# Altium PCB MGMEZZ02.PCBDOC (part 5 of 5)
Units mil, origin at the board's own origin, x right, y up, seen from the top; angles counter-clockwise.
Board outline 5705.83 x 3625.73 mil, 6 copper layers (Top Layer, Internal Plane 1, Mid-Layer 1, Mid-Layer 2, Internal Plane 2, Bottom Layer); 570 components, 354 nets, 2192 pads, 728 vias.
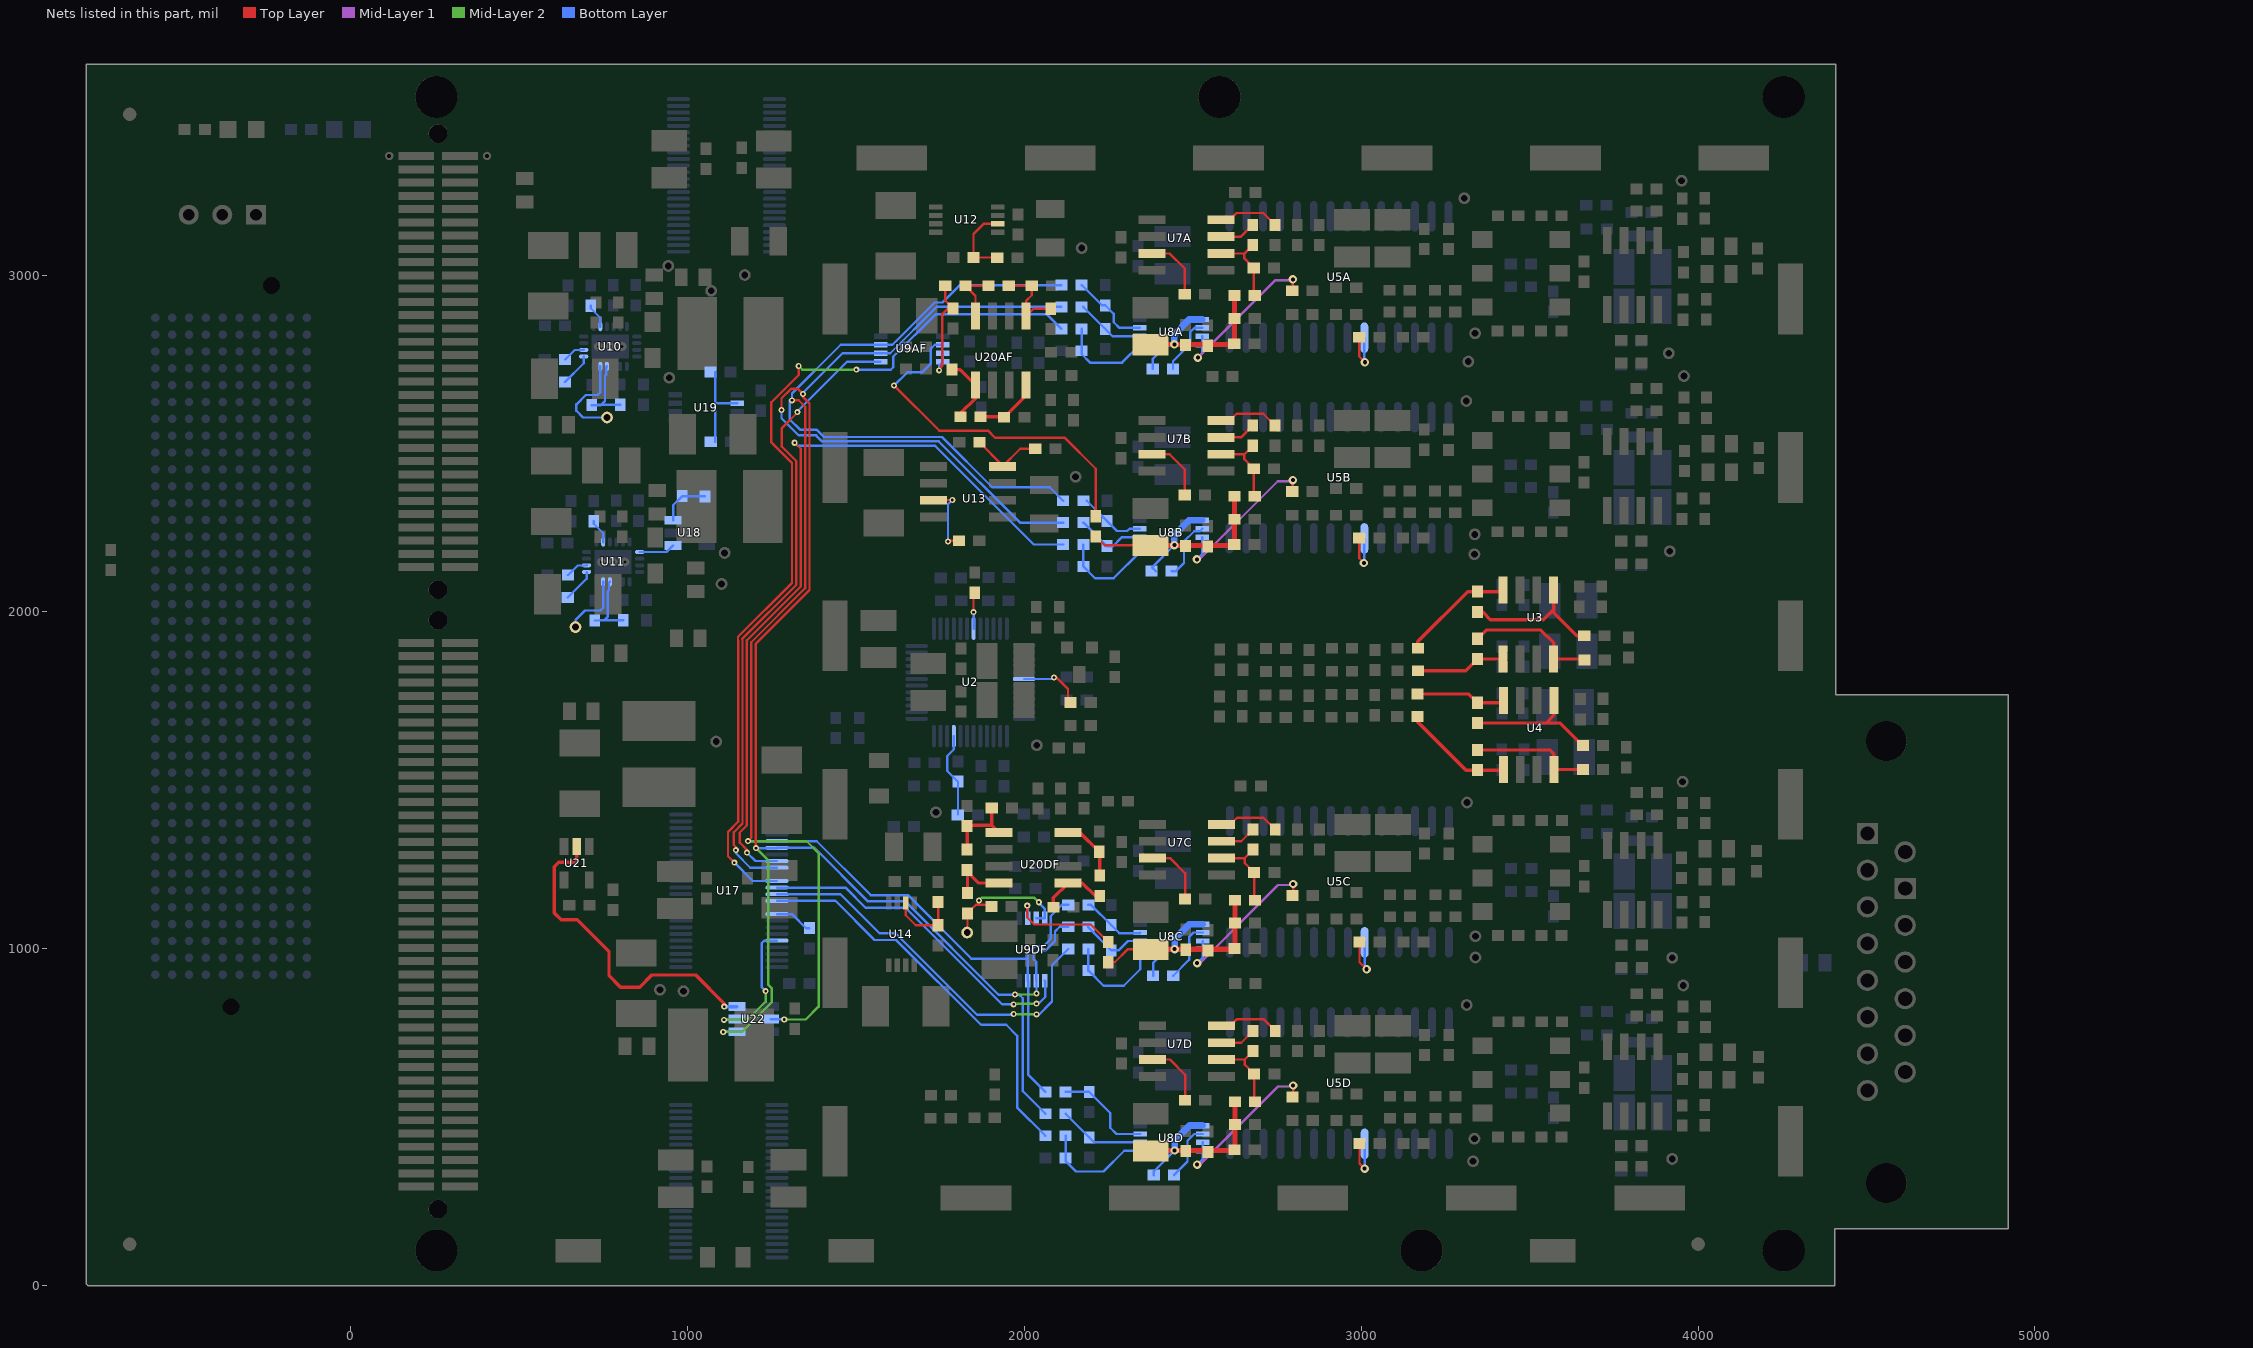
[diagram p9: the nets of this part, all layers, seen from the top]

## Via types
v1: diameter 25, hole 12, Top Layer to Bottom Layer, 292 vias
v2: diameter 18, hole 8, Top Layer to Bottom Layer, 225 vias
v3: diameter 25, hole 15, Top Layer to Bottom Layer, tented both sides, 91 vias
v4: diameter 18, hole 8, Top Layer to Bottom Layer, tented both sides, 61 vias
v5: diameter 35, hole 20, Top Layer to Bottom Layer, 58 vias
v6: diameter 40, hole 20, Top Layer to Bottom Layer, 1 vias

## Nets (pads, with @x,y where several pads share a name; then routed paths per layer and width w, separated by ;. In a path a pad name is that pad's centre, name@x,y a point inside that pad or via, vN(x,y) a via of type N, cw(c..) or ccw(c..) an arc to the next point about the centre after c; other vN are vias at no path point) (continued)
NetR1_1: R1.1 R2.2 U3.4 | length 336.4
  Top Layer w10: R2.2@3168,1892 3168,1912 3316,2060 R1.1@3345,2060 3416,2060 U3.4@3421,2065
NetR1_2: R1.2 R3.1 U3.1 | length 434.5
  Top Layer w10: R1.2@3345,2000 3360,2000 3383,1977 3541,1977 3571,2007 ; U3.1@3571,2065 3571,2007 ; R3.1@3662,1929 3640,1929 3571,1998 3571,2007
NetR6_1: R6.1 R8.2 U3.8 | length 393.8
  Top Layer w10: R8.2@3345,1920 3371,1946 3533,1946 3571,1908 U3.8@3571,1860 3660,1860 R6.1@3663,1857
NetR7_2: R7.2 R8.1 U3.5 | length 267.5
  Top Layer w10: R7.2@3168,1825 3310,1825 R8.1@3345,1860 U3.5@3421,1860
NetR9_1: R9.1 R10.2 U4.4 | length 268.7
  Top Layer w10: R10.2@3167,1756 3319,1756 R9.1@3345,1730 3415,1730 U4.4@3422,1737
NetR9_2: R9.2 R11.1 U4.1 | length 417.3
  Top Layer w10: R9.2@3345,1670 3549,1670 ; U4.1@3572,1737 3572,1693 3549,1670 ; R11.1@3658,1603 3591,1670 3549,1670
NetR14_2: R14.2 U2.43 | length 108.2
  Top Layer w7: v2(1849,1999) 1849,2053.19 R14.2@1852.59,2056.78
  Bottom Layer w7: v2(1849,1999) 1849.43,1998.57 U2.43@1849.43,1950.23
NetR15_1: R15.1 R17.2 U4.8 | length 364
  Top Layer w10: R17.2@3345,1590 3560,1590 3572,1578 U4.8@3572,1532 R15.1@3658,1532
NetR16_2: R16.2 R17.1 U4.5 | length 330.5
  Top Layer w10: R16.2@3167,1689 3167,1674 3311,1530 R17.1@3345,1530 3420,1530 U4.5@3422,1532
NetR18_2: R18.2 U2.6 | length 189
  Top Layer w7: v2(2088,1805) 2095.72,1805 2129.4,1771.32 R18.2@2129.4,1731
  Bottom Layer w7: U2.6@1999.04,1800.62 2088,1800.62 v2(2088,1805)
NetR26A_1: R26A.1 U5A.6 | length 154.9
  Top Layer w7: R26A.1@2994,2815 2994,2758 v1(3011,2741)
  Bottom Layer w7: v1@3009,2740 U5A.6@3009,2813.88
NetR26B_1: R26B.1 U5B.6 | length 155.1
  Top Layer w7: R26B.1@2994,2219 2994,2159 v1(3008,2145)
  Bottom Layer w7: v1(3008,2145) 3009,2144 U5B.6@3009,2217.88
NetR26C_1: R26C.1 U5C.6 | length 172.1
  Top Layer w7: R26C.1@2995,1020 2995,960 v1(3016,939)
  Bottom Layer w7: U5C.6@3010,1018.88 3010,945 v1(3016,939)
NetR26D_1: R26D.1 U5D.6 | length 163.6
  Top Layer w7: R26D.1@2995,422 2995,362 v1(3010,347)
  Bottom Layer w7: U5D.6@3010,420.88 v1(3010,347) v1@3016,341
NetR27_2: R27.2 R28.1 U12.2 | length 225.1
  Top Layer w7: R27.2@1919.25,3051.3 1918.71,3051.84 R28.1@1848.91,3051.84 1848.91,3121.66 1879.04,3151.79 U12.2@1921.14,3151.79
NetR30A_2: R30A.2 U8A.3 U8A.4 | length 485.2
  Top Layer w7: R30A.2@2795,2953 2797,2955 v1(2797,2987)
  Mid-Layer 1 w7: v1@2520,2752 2520,2760 2744,2984 v1@2797,2984
  Bottom Layer w7: v1@2512,2752 2528,2768 U8A.4@2528,2793 U8A.3@2528,2818
  other v1: 2515,2755
NetR30B_2: R30B.2 U8B.3 U8B.4 | length 488.6
  Top Layer w7: R30B.2@2795,2357 2797,2359 v1(2797,2391)
  Mid-Layer 1 w7: v1(2512,2156) 2520,2156 2752,2388 v1@2797,2388
  Bottom Layer w7: v1(2512,2156) 2528,2172 U8B.4@2528,2197 U8B.3@2528,2222
NetR30C_2: R30C.2 U8C.3 U8C.4 | length 488.6
  Top Layer w7: R30C.2@2796,1158 2798,1160 v1(2798,1192)
  Mid-Layer 1 w7: v1(2513,957) 2521,957 2753,1189 v1@2798,1189
  Bottom Layer w7: v1(2513,957) 2529,973 U8C.4@2529,998 U8C.3@2529,1023
NetR30D_2: R30D.2 U8D.3 U8D.4 | length 488.6
  Top Layer w7: R30D.2@2796,560 2798,562 v1(2798,594)
  Mid-Layer 1 w7: v1(2513,359) 2521,359 2753,591 v1@2798,591
  Bottom Layer w7: v1(2513,359) 2529,375 U8D.4@2529,400 U8D.3@2529,425
NetR32AF_2: R32AF.2 R98AF.2 U9AF.3 U9AF.4 | length 340.4
  Top Layer w7: v2@1744.5,2719.5 1756.56,2731.56 1756.56,2884.56 1773,2901 R32AF.2@1788,2901 1765,2924 R98AF.2@1765,2968
  Bottom Layer w7: v2(1747,2717) 1747,2732 U9AF.4@1758,2743 U9AF.3@1758,2768
NetR32DF_2: R32DF.2 R98DF.2 SlowDacDF.1 U9DF.3 U9DF.4 | length 421.9
  Top Layer w7: SlowDacDF.1@1830,1048 1831,1049 R98DF.2@1831,1105 1857,1131 1896,1131 R32DF.2@1902,1125
  Mid-Layer 2 w7: 1864,1131 v2(1865,1143) 1873,1151 2030,1151 v2(2043,1138)
  Bottom Layer w7: U9DF.3@2035,1090 U9DF.4@2060,1090 2060,1119 v2@2042,1137 ; v2@2041,1138 v2(2043,1138)
NetR38_1: R38.1 U13.7 | length 214.8
  Top Layer w7: U13.7@1730.24,2331.47 1730.87,2332.1 v2(1785.95,2332.1) ; v2@1775.75,2211.35 R38.1@1805.8,2211.35
  Bottom Layer w7: v2(1773.07,2208.67) 1773.07,2319.22 v2(1785.95,2332.1)
NetR39_2: R39.2 R40.1 U13.4 | length 219.2
  Top Layer w7: R40.1@1866.44,2503.29 1935.24,2434.49 U13.4@1935.24,2431.47 1987.74,2483.97 R39.2@2032.37,2483.97
NetR41_2: R41.2 R42.1 U14.2 | length 214
  Top Layer w7: U14.2@1647.51,1135.74 1647.51,1099.43 1677.33,1069.61 R42.1@1743.88,1069.61 1743.88,1137.87 R41.2@1743.34,1138.41
NetR47_2: R47.2 R48.1 U2.21 | length 253.6
  Bottom Layer w7: U2.21@1790.37,1631.33 1790.37,1591.37 1771,1572 1771,1527.88 R47.2@1803,1495.88 R48.1@1803,1399
NetR51A_1: R51A.1 R53A.2 R55A.1 U7A.6 | length 242.2
  Top Layer w7: U7A.6@2584,3064 2653,3064 ; R51A.1@2678,3089 2653,3064 ; R55A.1@2684,2939 2681,2942 R53A.2@2681,3021 2653,3049 2653,3064
NetR51A_2: R51A.2 U7A.7 | length 108.5
  Top Layer w7: U7A.7@2584,3114 2643,3114 R51A.2@2678,3149
NetR51B_1: R51B.1 R53B.2 R55B.1 U7B.6 | length 242.2
  Top Layer w7: U7B.6@2584,2468 2653,2468 ; R51B.1@2678,2493 2653,2468 ; R55B.1@2684,2343 2681,2346 R53B.2@2681,2425 2653,2453 2653,2468
NetR51B_2: R51B.2 U7B.7 | length 108.5
  Top Layer w7: U7B.7@2584,2518 2643,2518 R51B.2@2678,2553
NetR51C_1: R51C.1 R53C.2 R55C.1 U7C.6 | length 242.2
  Top Layer w7: U7C.6@2585,1269 2654,1269 ; R51C.1@2679,1294 2654,1269 ; R55C.1@2685,1144 2682,1147 R53C.2@2682,1226 2654,1254 2654,1269
NetR51C_2: R51C.2 U7C.7 | length 108.5
  Top Layer w7: U7C.7@2585,1319 2644,1319 R51C.2@2679,1354
NetR51D_1: R51D.1 R53D.2 R55D.1 U7D.6 | length 242.2
  Top Layer w7: U7D.6@2585,671 2654,671 ; R51D.1@2679,696 2654,671 ; R55D.1@2685,546 2682,549 R53D.2@2682,628 2654,656 2654,671
NetR51D_2: R51D.2 U7D.7 | length 108.5
  Top Layer w7: U7D.7@2585,721 2644,721 R51D.2@2679,756
NetR52A_1: R52A.1 U7A.3 | length 191.6
  Top Layer w7: U7A.3@2379,3064 2431,3064 2476,3019 R52A.1@2476,2943
NetR52B_1: R52B.1 U7B.3 | length 191.6
  Top Layer w7: U7B.3@2379,2468 2431,2468 2476,2423 R52B.1@2476,2347
NetR52C_1: R52C.1 U7C.3 | length 191.6
  Top Layer w7: U7C.3@2380,1269 2432,1269 2477,1224 R52C.1@2477,1148
NetR52D_1: R52D.1 U7D.3 | length 191.6
  Top Layer w7: U7D.3@2380,671 2432,671 2477,626 R52D.1@2477,550
NetR54A_1: R54A.1 U7A.8 | length 182.8
  Top Layer w7: U7A.8@2584,3164 2610,3164 2630,3184 2709,3184 R54A.1@2744,3149
NetR54B_1: R54B.1 U7B.8 | length 182.8
  Top Layer w7: U7B.8@2584,2568 2610,2568 2630,2588 2709,2588 R54B.1@2744,2553
NetR54C_1: R54C.1 U7C.8 | length 182.8
  Top Layer w7: U7C.8@2585,1369 2611,1369 2631,1389 2710,1389 R54C.1@2745,1354
NetR54D_1: R54D.1 U7D.8 | length 182.8
  Top Layer w7: U7D.8@2585,771 2611,771 2631,791 2710,791 R54D.1@2745,756
NetR62_1: R62.1 R68.1 U10.4 | length 217.7
  Bottom Layer w7: R68.1@715.64,2613.88 743.01,2613.88 754.97,2625.84 754.97,2700.84 758.19,2704.06 758.19,2726.23 U10.4@760.66,2728.7 ; 732.48,2614.38 799.88,2614.38 R62.1@800.45,2614.95
NetR63_1: R63.1 R69.1 U11.4 | length 217.7
  Bottom Layer w7: R69.1@724.23,1974.19 751.6,1974.19 763.55,1986.15 763.55,2061.15 766.77,2064.37 766.77,2086.54 U11.4@769.24,2089.01 ; 741.07,1974.69 808.46,1974.69 R63.1@809.04,1975.27
NetR66_2: R66.2 U10.12 | length 73.4
  Bottom Layer w7: R66.2@712.9,2908.62 712.9,2901.05 740.97,2872.98 U10.12@740.97,2846.81
NetR67_2: R67.2 U11.12 | length 73.4
  Bottom Layer w7: R67.2@721.49,2268.94 721.49,2261.36 749.56,2233.29 U11.12@749.56,2207.12
NetR70_2: R70.2 U10.7 | length 99.1
  Bottom Layer w7: R70.2@635.85,2682.31 691.76,2738.22 U10.7@691.76,2758.23
NetR71_1: R71.1 R75.1 U18.3 | length 150
  Bottom Layer w7: U18.3@957.14,2271.97 957.14,2316.58 983.43,2342.87 R71.1@1051.59,2342.87
NetR72_2: R72.2 U10.8 | length 67.6
  Bottom Layer w7: R72.2@636.11,2749.12 637.07,2749.12 665.39,2777.44 691.29,2777.44 U10.8@691.76,2777.91
NetR73_2: R73.2 U11.8 | length 67.6
  Bottom Layer w7: R73.2@644.7,2109.43 645.65,2109.43 673.97,2137.75 699.87,2137.75 U11.8@700.35,2138.23
NetR74_2: R74.2 U11.7 | length 99.1
  Bottom Layer w7: R74.2@644.43,2042.62 700.35,2098.53 U11.7@700.35,2118.54
NetR85_2: R85.2 R86.1 U19.2 | length 272
  Bottom Layer w7: R86.1@1082,2504.98 R85.2@1082,2710.98 ; 1082,2619 U19.2@1148,2619
NetR94AF_2: R94AF.2 R95AF.1 R99AF.1 U20AF.5 | length 247.6
  Top Layer w7: R99AF.1@1953.59,2968 R94AF.2@2022,2968 2022,2940 2005,2923 U20AF.5@2005,2878 2027,2900 R95AF.1@2078,2900
NetR94DF_2: R94DF.2 R95DF.1 R99DF.1 U20DF.5 | length 226.4
  Top Layer w10: R99DF.1@1830,1294 R94DF.2@1830,1364 1833,1367 1903,1367 ; R95DF.1@1903,1418 1903,1367 ; U20DF.5@1925,1345 1903,1367
NetR96AF_1: R96AF.1 R100AF.2 U20AF.4 | length 192.3
  Top Layer w10: R96AF.1@1870,2579 1939,2579 R100AF.2@1940,2578 2005,2643 U20AF.4@2005,2673
NetR96AF_2: R96AF.2 R97AF.1 U20AF.1 | length 201.7
  Top Layer w10: R97AF.1@1785,2719 1809,2719 U20AF.1@1855,2673 1855,2634 1810,2589 R96AF.2@1810,2579
NetR96DF_1: R96DF.1 R100DF.2 U20DF.4 | length 187.4
  Top Layer w10: U20DF.4@2130,1345 2165,1345 R100DF.2@2222,1288 2224,1286 R96DF.1@2224,1217
NetR96DF_2: R96DF.2 R97DF.1 U20DF.1 | length 200
  Top Layer w10: R97DF.1@2086,1123 2086,1151 U20DF.1@2130,1195 2172.05,1195 2210.05,1157 R96DF.2@2224,1157
NetR98AF_1: R98AF.1 R99AF.2 U20AF.8 | length 171
  Top Layer w7: U20AF.8@1855,2878 1855,2938 R98AF.1@1825,2968 R99AF.2@1893.59,2968
NetR98DF_1: R98DF.1 R99DF.2 U20DF.8 | length 177.5
  Top Layer w10: R99DF.2@1830,1234 1831,1233 R99DF.2@1831,1229 ; R98DF.1@1831,1165 R99DF.2@1831,1229 ; U20DF.8@1925,1195 1865,1195 R99DF.2@1831,1229
NetR104A_1: R104A.1 U8A.2 | length 171.5
  Bottom Layer w7: R104A.1@2441,2721 2441,2744 2492,2795 2492,2830 2505,2843 U8A.2@2528,2843
NetR104B_1: R104B.1 U8B.2 | length 180.9
  Bottom Layer w7: R104B.1@2437,2121 2450,2121 2474,2145 2474,2209.44 2504.06,2239.5 2520.5,2239.5 U8B.2@2528,2247
NetR104C_1: R104C.1 U8C.2 | length 179.9
  Bottom Layer w7: R104C.1@2442,920 2489,967 2489,1035 2502,1048 U8C.2@2529,1048
NetR104D_1: R104D.1 U8D.2 | length 171.9
  Bottom Layer w7: R104D.1@2444,328 2484,368 2484,430 2504,450 U8D.2@2529,450
NetR105AF_1: R105AF.1 U9AF.2 | length 1063.2
  Top Layer w7: v2(1613,2672) 1747,2538 1892,2538 1913,2517 2068.84,2517 2069.34,2516.5 2120.5,2516.5 2212,2425 R105AF.1@2212,2284
  Bottom Layer w7: v2(1613,2672) 1651.98,2710.98 1695.98,2710.98 1722.5,2737.5 1722.5,2781.5 1734,2793 U9AF.2@1758,2793
NetR105DF_1: R105DF.1 U9DF.2 | length 344.5
  Top Layer w7: v2(2008.5,1128) 2008.5,1092.73 2029.23,1072 2197,1072 R105DF.1@2249,1020
  Bottom Layer w7: v2(2008.5,1128) 2010,1126.5 U9DF.2@2010,1090
NetTMON1_1: TMON1.1 U10.5 | length 281.1
  Bottom Layer w7: U10.5@740.97,2728.7 740.97,2695.99 741.14,2695.82 741.14,2651.95 732.86,2643.67 697.67,2643.67 670,2616 670,2597 690,2577 TMON1.1@761,2577
NetTMON2_1: TMON2.1 U11.5 | length 195.4
  Bottom Layer w7: TMON2.1@667.35,1954.87 667.35,1976.07 695.25,2003.98 741.45,2003.98 749.73,2012.26 749.73,2056.13 749.56,2056.3 U11.5@749.56,2089.01
NetU11_17: U11.17 U18.1 | length 107.3
  Bottom Layer w7: U11.17@857.83,2177.6 937.76,2177.6 U18.1@957.14,2196.97
POWERENABLE: R33.1 U17.16 | length 113.8
  Bottom Layer w7: U17.16@1265.53,1102.75 1310.25,1102.75 1352,1061 R33.1@1362,1061
REFVOLTA: C78A.1 C83A.1 C85A.1 R55A.2 R56A.1 R57A.1 R104A.2 U8A.1 | length 632
  Top Layer w15: C78A.1@2378.5,2793.38 2620.38,2793.38 R57A.1@2623,2796 2624,2797 R56A.1@2624,2871 R55A.2@2624,2939
  Bottom Layer w7: R104A.2@2381,2721 2381,2751 2424,2794 v1(2445,2794)
  Bottom Layer w20: v1(2445,2794) 2445,2824 2489,2868 U8A.1@2528,2868
REFVOLTB: C78B.1 C83B.1 C85B.1 R55B.2 R56B.1 R57B.1 R104B.2 R105AF.2 U8B.1 | length 802.4
  Top Layer w7: R105AF.2@2212,2224 2238.62,2197.38 2373.5,2197.38 C78B.1@2374,2196.88
  Top Layer w15: C78B.1@2378.5,2197.38 2620.38,2197.38 R57B.1@2623,2200 2624,2201 R56B.1@2624,2275 R55B.2@2624,2343
  Bottom Layer w7: R104B.2@2390,2121 2379,2132 v1(2445,2198)
  Bottom Layer w20: v1(2445,2198) 2445,2228 2489,2272 U8B.1@2528,2272
REFVOLTC: C78C.1 C83C.1 C85C.1 R55C.2 R56C.1 R57C.1 R104C.2 R105DF.2 U8C.1 | length 780.9
  Top Layer w7: R105DF.2@2249,960 2268,960 2305.88,997.88 C78C.1@2375,997.88
  Top Layer w15: C78C.1@2379.5,998.38 2621.38,998.38 R57C.1@2624,1001 2625,1002 R56C.1@2625,1076 R55C.2@2625,1144
  Bottom Layer w7: R104C.2@2382,920 2382,958 2423,999 v1(2446,999)
  Bottom Layer w20: v1(2446,999) 2446,1029 2490,1073 U8C.1@2529,1073
REFVOLTD: C78D.1 C83D.1 C85D.1 R55D.2 R56D.1 R57D.1 R104D.2 U8D.1 | length 618.9
  Top Layer w15: C78D.1@2379.5,400.38 2621.38,400.38 R57D.1@2624,403 2625,404 R56D.1@2625,478 R55D.2@2625,546
  Bottom Layer w7: R104D.2@2384,328 2384,339 v1(2446,401)
  Bottom Layer w20: v1(2446,401) 2446,431 2490,475 U8D.1@2529,475
SPI_CLK: R89A.1 R89B.1 R89C.1 R89D.1 U9AF.6 U9DF.6 U17.6 U22.4 | length 5788.1
  Top Layer w7: v2(1203.46,1298.55) 1202,1300.01 1202,1904.57 1362,2064.57 1362,2619 1343,2638 v2(1343,2647) 1328,2662 1307,2662 1279,2634 v2(1279,2599)
  Mid-Layer 2 w7: v2(1106,753) 1162,753 1250.5,841.5 1250.5,881.66 1240,892.16 1240,1262.01 v2(1203.46,1298.55) ; v2(1972,864) 2033,864 v2(2036,867)
  Bottom Layer w7: v2(1106,753) 1146.5,753 U22.4@1147,753.5 ; v2(1203.46,1298.55) 1264.48,1298.55 U17.6@1265.53,1299.6 1376.82,1299.6 1536.02,1140.41 1646.59,1140.41 1924,863 1985,863 1995,853 1995,577.32 R89D.1@2062.32,510 ; v2(1279,2599) 1279,2575 1330,2524 1381.62,2524 1399.62,2506 1746,2506 1987,2265 R89B.1@2115,2265 ; v2@1341,2649 1460,2768 U9AF.6@1573,2768 1602,2768 1739.28,2905.28 R89A.1@2110,2905.28 ; v2(2036,867) 2036,904 U9DF.6@2035,905 2035,961.14 2027,969.14 2027,982 2039.5,994.5 2062.5,994.5 2091,1023 2091,1051 2105,1065 R89C.1@2130,1065
SPI_CLK_2V5A: R89A.2 R90A.1 U8A.6 | length 204.4
  Bottom Layer w7: R89A.2@2174.72,2905.28 R90A.1@2240,2840 2262,2818 U8A.6@2343,2818
SPI_CLK_2V5B: R89B.2 R90B.1 U8B.6 | length 208.2
  Bottom Layer w7: R89B.2@2175,2265 R90B.1@2245,2195 2263,2195 2290,2222 U8B.6@2343,2222
SPI_CLK_2V5C: R89C.2 R90C.1 U8C.6 | length 195.8
  Bottom Layer w7: R89C.2@2190,1065 2190,1063 R90C.1@2258,995 2279.12,995 2307.12,1023 U8C.6@2344,1023
SPI_CLK_2V5D: R89D.2 R90D.1 U8D.6 | length 256.9
  Bottom Layer w7: R89D.2@2122.32,510 R90D.1@2192.32,440 2207.32,425 U8D.6@2344,425
SPI_CURRENT_CS_2V5A: R91A.2 R92A.1 U8A.5 | length 275.3
  Bottom Layer w7: R92A.1@2170,2775 2170,2765 2195,2740 2290,2740 U8A.5@2343,2793 ; R92A.1@2170,2780 R91A.2@2170,2840
SPI_CURRENT_CS_2V5B: R91B.2 R92B.1 U8B.5 | length 299.1
  Bottom Layer w7: R91B.2@2175,2200 R92B.1@2175,2135 2175,2134.78 2210,2099.78 2264.78,2099.78 2343,2178 U8B.5@2343,2197
SPI_CURRENT_CS_2V5C: R91C.2 R92C.1 U8C.5 | length 315.9
  Bottom Layer w7: R91C.2@2190,999 R92C.1@2190,935 2235,890 2295,890 2344,939 U8C.5@2344,998
SPI_CURRENT_CS_2V5D: R91D.2 R92D.1 U8D.5 | length 335.4
  Bottom Layer w7: R91D.2@2122.32,445 R92D.1@2122.32,378.78 2122.32,369.6 2153.38,338.54 2235.07,338.54 2296.53,400 U8D.5@2344,400
SPI_CURRENT_CSA: R91A.1 U17.11 | length 2657.4
  Top Layer w7: v2(1139.06,1255.62) 1120,1274.68 1120,1346.77 1150,1376.77 1150,1915 1149.83,1915.17 1149.83,1925.94 1310,2086.11 1310,2441.62 1249,2502.62 1249,2622.38 1330,2703.38 v2(1330,2730)
  Mid-Layer 2 w7: v2(1330,2730) 1341,2719 v2(1501,2719)
  Bottom Layer w7: v2(1139.06,1255.62) 1193.5,1201.18 U17.11@1265.53,1201.18 ; v2(1501,2719) 1603,2719 1610.69,2726.69 1610.69,2757.69 1736,2883 2067,2883 R91A.1@2110,2840
SPI_CURRENT_CSB: R91B.1 U17.8 | length 2329.6
  Top Layer w7: v2(1176.76,1285) 1176.76,1293.24 1155,1315 1155,1345 1176,1366 1176,1915.34 1336,2075.34 1336,2484 v2(1318,2502)
  Bottom Layer w7: v2(1176.76,1285) 1201.53,1260.23 U17.8@1265.53,1260.23 ; v2(1318,2502) 1327,2493 1735,2493 2028,2200 R91B.1@2115,2200
SPI_CURRENT_CSC: R91C.1 U17.13 | length 1154.4
  Top Layer w7: v2(1968,806) v2@1969,805
  Mid-Layer 2 w7: v2@1969,805 v2(2036,805)
  Bottom Layer w7: U17.13@1265.53,1161.81 1454.19,1161.81 1570,1046 1617.59,1046 1859.59,804 v2@1968,804 ; v2@2040,801 2082,843 2082,951 R91C.1@2130,999
SPI_CURRENT_CSD: R91D.1 U17.14 | length 1210.1
  Bottom Layer w7: U17.14@1265.53,1142.12 1438.88,1142.12 1555,1026 1619.2,1026 1871.2,774 1946,774 1978.33,741.67 1978.33,528.99 R91D.1@2062.32,445
SPI_MISO: U21.2 U22.6 | length 991.7
  Top Layer w10: U21.2@671,1303.53 671,1256.77 617.4,1256.77 604,1243.37 604,1106 624.46,1085.54 672.46,1085.54 767,991 767,920 801,886 858,886 894,922 1024,922 1109,837 v2(1109,828)
  Bottom Layer w10: v2(1109,828) 1146.5,828 U22.6@1147,828.5
SPI_MOSI: R87A.1 R87B.1 R87C.1 R87D.1 U9AF.7 U9DF.7 U17.5 U22.2 | length 5795.3
  Top Layer w7: v2(1179.21,1319.21) 1189,1329 1189,1909.95 1349,2069.95 1349,2609 1330,2628 v2(1310,2628)
  Mid-Layer 2 w7: v2(1179.21,1319.21) 1353.79,1319.21 1389,1284 1389,828 1351,790 v2(1287,790)
  Bottom Layer w7: v2(1179.21,1319.21) 1265.45,1319.21 U17.5@1265.53,1319.29 1383.43,1319.29 1543.72,1159 1654,1159 1842.5,970.5 2008.5,970.5 2010,972 ; U22.2@1247,791 1286,791 v2(1287,790) ; v2@1303,2628 1303,2572 1334,2541 1383,2541 1405,2519 1755.5,2519 1904.5,2370 2075,2370 R87B.1@2115,2330 ; v2(1310,2628) 1310,2648 1455,2793 U9AF.7@1573,2793 1608.62,2793 1733.9,2918.28 1757.28,2918.28 1809,2970 R87A.1@2110,2970 ; R87D.1@2062.32,575 2011,626.32 2011,904 U9DF.7@2010,905 2010,972 ; R87C.1@2130,1130 2111,1130 2078,1097 2078,1028.84 2056.66,1007.5 2031.5,1007.5 2010,986 2010,972
SPI_MOSI_2V5A: R87A.2 R88A.1 U8A.7 | length 240
  Bottom Layer w7: R87A.2@2170,2970 2230,2910 R88A.1@2240,2910 2265.5,2884.5 2265.5,2859.96 2282.46,2843 U8A.7@2343,2843
SPI_MOSI_2V5B: R87B.2 R88B.1 U8B.7 | length 198.2
  Bottom Layer w7: R87B.2@2185,2330 R88B.1@2245,2270 2275,2240 2305,2240 2312,2247 U8B.7@2343,2247
SPI_MOSI_2V5C: R87C.2 R88C.1 U8C.7 | length 189.6
  Bottom Layer w7: R87C.2@2190,1130 2198,1130 R88C.1@2258,1070 2282,1046 2342,1046 U8C.7@2344,1048
SPI_MOSI_2V5D: R87D.2 R88D.1 U8D.7 | length 299.1
  Bottom Layer w7: R87D.2@2122.32,575 R88D.1@2192.32,575 2255,512.32 2255,468.52 2273.52,450 U8D.7@2344,450
SPI_OFFSET_CSAF: U9AF.5 U17.9 | length 1875
  Top Layer w7: v2(1143.36,1292.65) 1143.36,1301.5 1137,1307.85 1137,1345.38 1163,1371.38 1163,1920.39 1162.83,1920.56 1323,2080.72 1323,2447 1280,2490 1280,2545.53 v2@1325.74,2591.27
  Bottom Layer w7: v2@1144.43,1292.65 1144.43,1282.45 1186.33,1240.55 U17.9@1265.53,1240.55 ; v2@1324,2593 1474,2743 U9AF.5@1573,2743
  other v2: 1326,2593
SPI_OFFSET_CSDF: U9DF.5 U17.12 | length 993.9
  Mid-Layer 2 w7: v2@1969,837 v2(2036,837)
  Bottom Layer w7: U17.12@1265.53,1181.49 1468.51,1181.49 1528.28,1121.72 1646.89,1121.72 1933.62,835 v2@1969,835 ; v2@2040,835 2062,857 2062,903 U9DF.5@2060,905
  other v2: 1968,835
TEMPSENSE_CS: U17.20 U22.5 | length 413
  Mid-Layer 2 w7: v2(1108,789) 1178,789 1232,843 v2(1232,874)
  Bottom Layer w7: v2(1108,789) 1145,789 U22.5@1147,791 ; v2(1232,874) 1220,886 1220,1016 1228.01,1024.01 U17.20@1265.53,1024.01
pads on no net: FM1.0 FM1.1 FM2.0 FM2.1 FM3.0 FM3.1 J1.15 J1.16 J1.17 J1.18 J1.20 J1.22 J1.24 J1.38 J1.39 J1.40 J1.41 J1.42 J1.43 J1.44 J1.67 J1.68 J1.69 J1.70 J1.71 J1.72 J1.73 J1.74 J1.HOLE1 J1.HOLE2 J2.4 J2.5 J2.Hole29 J2.Hole30 J3.21 J3.22 J3.23 J3.24 J3.25 J3.26 J3.27 J3.28 J3.29 J3.30 J3.31 J3.32 J3.33 J3.34 J3.35 J3.36 J3.37 J3.38 J3.39 J3.40 J3.41 J3.42 J3.43 J3.44 J3.47 J3.48 J3.49 J3.53 J3.54 J3.55 J3.56 J3.57 J3.58 J3.59 J3.60 J3.61 J3.62 J3.63 J3.64 J3.HOLE1 J3.HOLE2 J4.2 L9A.1@3356,3149 L9B.1@3356,2553 L9C.1@3357,1354 L9D.1@3357,756 L15.2@860.42,2727.08 L16.2@869.01,2087.39 MH1.1 MH2.1 MH3.1 MH4.1 MH5.1 MH6.1 P1.A2 P1.A3 P1.A6 P1.A7 P1.A10 P1.A11 P1.A14 P1.A15 P1.A18 P1.A19 P1.A22 P1.A23 P1.A26 P1.A27 P1.A30 P1.A31 P1.A34 P1.A35 P1.A38 P1.A39 P1.B1 P1.B4 P1.B5 P1.B8 P1.B9 P1.B12 P1.B13 P1.B16 P1.B17 P1.B20 P1.B21 P1.B24 P1.B25 P1.B28 P1.B29 P1.B32 P1.B33 P1.B36 P1.B37 P1.B40 P1.C2 P1.C3 P1.C6 P1.C7 P1.C26 P1.C27 P1.C30 P1.C31 P1.C34 P1.D1 P1.D4 P1.D5 P1.D9 P1.D26 P1.D27 P1.D29 P1.D33 P1.D34 P1.D35 P1.E2 P1.E3 P1.E6 P1.E7 P1.E9 P1.E10 P1.E12 P1.E13 P1.E15 P1.E16 P1.E18 P1.E19 P1.E21 P1.E22 P1.E24 P1.E25 P1.E27 P1.E28 P1.E30 P1.E31 P1.E33 P1.E34 P1.E36 P1.E37 P1.F4 P1.F5 P1.F7 P1.F8 P1.F10 P1.F11 P1.F13 P1.F14 P1.F16 P1.F17 P1.F19 P1.F20 P1.F22 P1.F23 P1.F25 P1.F26 P1.F28 P1.F29 P1.F31 P1.F32 P1.F34 P1.F35 P1.F37 P1.F38 P1.G2 P1.G3 P1.G18 P1.G19 P1.G30 P1.H1 P1.H4 P1.H5 P1.J2 P1.J3 P1.J6 P1.J7 P1.J9 P1.J10 P1.J12 P1.J13 P1.J15 P1.J16 P1.J18 P1.J19 P1.J21 P1.J22 P1.J24 P1.J25 P1.J27 P1.J28 P1.J30 P1.J31 P1.J33 P1.J34 P1.J36 P1.J37 P1.J39 P1.K1 P1.K4 P1.K5 P1.K7 P1.K8 P1.K10 P1.K11 P1.K13 P1.K14 P1.K16 P1.K17 P1.K19 P1.K20 P1.K22 P1.K23 P1.K25 P1.K26 P1.K28 P1.K29 P1.K31 P1.K32 P1.K34 P1.K35 P1.K37 P1.K38 P1.K40 P1.MH1 P1.MH2 U3.0 U3.7 U4.0 U4.7 U5A.4 U5B.4 U5C.4 U5D.4 U6A.0 U6B.0 U6C.0 U6D.0 U7A.0 U7A.5 U7B.0 U7B.5 U7C.0 U7C.5 U7D.0 U7D.5 U10.18 U11.18 U12.6 U12.7 U13.0 U14.6 U14.7 U17.22 U17.23 U19.6 U19.7 U20AF.0 U20AF.7 U20DF.0 U20DF.7 U21.1

## Polygon pours and split planes (outlines as drawn)
DGND on Bottom Layer "Top Layer-No Net" (solid, remove dead copper, pour order 22): 1285,2765 1285,2389 995.04,2389 994.63,2399.14 994,2765
-5VA on Mid-Layer 2 "Top Layer-No Net" (solid, remove dead copper, pour order 10): 1483,3304 1483.9,3303 3960,3303 3960,2120 3790,2120 3790,1475 3960,1475 3960,305 1483,305
MB5V5P on Mid-Layer 2 "Mid-Layer 2-N1002964" (hatched Horizontal grid 7.5 track 8, remove dead copper, pour order 1005): 54.63,499 169.63,499 169.63,3314 344.63,3489 524.63,3489 524.63,3389 389.63,3389 339.63,3339 339.63,384 54.63,384
no net on Top Overlay (hatched 90Degree grid 7.5 track 8, remove dead copper): 4345,1335 4345,1350 4377.5,1350 4377.5,1370 4417.5,1342.5 4377.5,1315 4377.5,1335
no net on Top Overlay (hatched 90Degree grid 7.5 track 8, remove dead copper): 12.5,3345 12.5,3360 45,3360 45,3380 85,3352.5 45,3325 45,3345
no net on Top Overlay (hatched 90Degree grid 7.5 track 8, remove dead copper): 15,1900 15,1915 47.5,1915 47.5,1935 87.5,1907.5 47.5,1880 47.5,1900
+5VA on Mid-Layer 1 "Top Layer-No Net" (solid, remove dead copper, pour order 8): 1483,3304 3960,3304 3959.88,3303.87 3960,2120 3800,2120 3800,1470.5 3960,1470.5 3959.88,304 1483.9,304 1483,305
+5VD on Mid-Layer 1 "Top Layer-No Net" (solid, remove dead copper, pour order 14): 1123,3568 1370,3568 1370,65 1124.23,65 1124.23,3567 1123,3568
MB2V5P on Mid-Layer 1 "Top Layer-No Net" (solid, remove dead copper, pour order 12): 874.23,3568 1094,3568 1094,64 1051.36,64.61 873,64.61 873,1462 723,1551 722,1667.49 875,1748 873,3561.44
NetC101_2 on Top Layer "Top Layer-No Net" (solid, remove dead copper, pour order 20): 1535,2615 2145,2615 2145,2190 1540,2190 1535,2195
AGND on Top Layer "Top Layer-No Net" (solid, remove dead copper, pour order 18): 1490,1177.87 1490,881 1800,881 1800,1179
AGND on Top Layer "Top Layer-No Net" (solid, remove dead copper, pour order 16): 1670.33,3270 2160,3270 2160,2986.53 2159.39,2985.92 1667.13,2985.92
CMODEC on Internal Plane 1 (split plane): 3847.45,1355 3847.45,1353 3847.45,1252.06 3799.2,1203.8 3798.65,1202.98 3798.45,1202 3798.45,931.55 3745.55,931.55 3745.55,1011 3745.36,1011.98 3744.8,1012.8 3658.67,1098.94 3639.55,1118.06 3639.55,1161.94 3653.56,1175.95 3710.5,1175.95 3711.48,1176.15 3712.3,1176.7 3759.8,1224.2 3760.36,1225.02 3760.55,1226 3760.55,1352.56 3760.98,1352.65 3761.8,1353.2 3784.8,1376.2 3785.36,1377.02 3785.55,1378 3785.55,1475.45 3847.45,1475.45
CMODEA on Internal Plane 1 (split plane): 3846.45,3150 3846.45,3148 3846.45,3047.06 3798.2,2998.8 3797.65,2997.98 3797.45,2997 3797.45,2724.55 3744.55,2724.55 3744.55,2806 3744.36,2806.98 3743.8,2807.8 3657.67,2893.94 3638.55,2913.06 3638.55,2956.94 3652.56,2970.95 3709.5,2970.95 3710.48,2971.15 3711.3,2971.7 3758.8,3019.2 3759.36,3020.02 3759.55,3021 3759.55,3146.94 3760.8,3148.2 3783.8,3171.2 3784.36,3172.02 3784.55,3173 3784.55,3271.45 3846.45,3271.45
CMODED on Internal Plane 1 (split plane): 3847.45,757 3847.45,755 3847.45,654.06 3799.2,605.8 3798.65,604.98 3798.45,604 3798.45,341.55 3745.55,341.55 3745.55,413 3745.36,413.98 3744.8,414.8 3658.67,500.94 3639.55,520.06 3639.55,563.94 3653.56,577.95 3710.5,577.95 3711.48,578.15 3712.3,578.7 3759.8,626.2 3760.36,627.02 3760.55,628 3760.55,754.56 3760.98,754.65 3761.8,755.2 3784.8,778.2 3785.36,779.02 3785.55,780 3785.55,878.45 3847.45,878.45
AGND on Internal Plane 1 (split plane): 4388.97,1754 4389.36,1750.08 4390.5,1746.31 4392.36,1742.83 4394.86,1739.79 4397.9,1737.29 4401.38,1735.43 4405.15,1734.29 4409.07,1733.9 4900.74,1733.9 4900.74,189.1 4405,189.1 4401.08,188.71 4397.31,187.57 4393.83,185.71 4390.79,183.21 4388.29,180.17 4386.43,176.69 4385.29,172.92 4384.9,169 4384.9,20.1 1127.1,20.1 1127.1,1487.68 1210.32,1570.9 1619,1570.9 1622.92,1571.29 1626.69,1572.43 1630.17,1574.29 1633.21,1576.79 1749.21,1692.79 1751.71,1695.83 1753.57,1699.31 1754.71,1703.08 1755.1,1707 1755.1,1875.68 1862.21,1982.79 1864.71,1985.83 1866.57,1989.31 1867.71,1993.08 1868.1,1997 1868.1,2123 1867.71,2126.92 1866.57,2130.69 1864.71,2134.17 1862.21,2137.21 1815.21,2184.21 1812.17,2186.71 1808.69,2188.57 1804.92,2189.71 1801,2190.1 1403.32,2190.1 1129.1,2464.32 1129.1,3605.64 4388.97,3605.64
CMODEB on Internal Plane 1 (split plane): 3846.45,2554 3846.45,2552 3846.45,2451.06 3798.2,2402.8 3797.65,2401.98 3797.45,2401 3797.45,2131.1 3744.55,2131.1 3744.55,2210 3744.36,2210.98 3743.8,2211.8 3657.67,2297.94 3638.55,2317.06 3638.55,2360.94 3652.56,2374.95 3709.5,2374.95 3710.48,2375.15 3711.3,2375.7 3758.8,2423.2 3759.36,2424.02 3759.55,2425 3759.55,2551.56 3759.98,2551.65 3760.8,2552.2 3783.8,2575.2 3784.36,2576.02 3784.55,2577 3784.55,2675.45 3846.45,2675.45
MBGND on Internal Plane 1 (split plane): 1088.9,2456 1089.29,2452.08 1090.43,2448.31 1092.29,2444.83 1094.79,2441.79 1380.79,2155.79 1383.83,2153.29 1387.31,2151.43 1391.08,2150.29 1395,2149.9 1792.68,2149.9 1827.9,2114.68 1827.9,2005.32 1720.79,1898.21 1718.29,1895.17 1716.43,1891.69 1715.29,1887.92 1714.9,1884 1714.9,1715.32 1610.68,1611.1 1202,1611.1 1198.08,1610.71 1194.31,1609.57 1190.83,1607.71 1187.79,1605.21 1092.79,1510.21 1090.29,1507.17 1088.43,1503.69 1087.29,1499.92 1086.9,1496 1086.9,20.1 -764.9,20.1 -764.9,3605.64 1088.9,3605.64
DGND on Internal Plane 2 (split plane): 153 vertices, not listed, extent 1126.04,20.1 3069.9,3605.64
AGND on Internal Plane 2 (split plane): 156 vertices, not listed, extent 1408.1,20.1 4900.74,3605.64
MBGND on Internal Plane 2 (split plane): 1068.04,3605.33 1071.81,3604.19 1075.73,3603.81 1085.9,3603.81 1085.9,2468 1086.29,2464.08 1087.43,2460.31 1089.03,2457.32 1088.9,2456 1089.29,2452.08 1090.43,2448.31 1092.29,2444.83 1094.79,2441.79 1382.79,2153.79 1385.83,2151.29 1389.31,2149.43 1393.08,2148.29 1397,2147.9 1792.68,2147.9 1828.9,2111.68 1828.9,2005.32 1722.79,1899.21 1720.29,1896.17 1718.43,1892.69 1717.29,1888.92 1716.9,1885 1716.9,1717.32 1611.68,1612.1 1195,1612.1 1191.08,1611.71 1187.31,1610.57 1183.83,1608.71 1180.79,1606.21 1094.79,1520.21 1092.29,1517.17 1090.43,1513.69 1089.29,1509.92 1088.9,1506 1088.9,20.91 1088.29,20.17 1088.25,20.1 -764.9,20.1 -764.9,3605.64 1067.48,3605.64

## Keep-outs
Keep-Out Layer:
  lines w50: -786.18,3625.73 4409.07,3625.73 4409.07,1814.87 4410,1754 4920.83,1754 4920.83,169 4405,169 4405,-1 -787,0.18 -786.18,3626
  text "KEEPOUT" at 2010,-1917.5 h100

## Other copper
Top Layer:
  text "Board Dim: 92mm x 125mm" at 4861.62,436.7 h30 r90
  text "L1 (TOP) .GTL" at 434.63,-686.63 h100
Mid-Layer 1:
  pour cut-out: 2162.95,905.39 3912.95,901.39 3917.95,901.39 3917.95,896.85 2163.01,898.99
  pour cut-out: 2141.97,1500.43 3891.97,1496.43 3896.97,1496.43 3896.97,1491.43 2142.03,1493.57
  pour cut-out: 2126.49,2129.39 3876.49,2125.39 3881.49,2125.39 3881.49,2120.39 2126.56,2122.53
  pour cut-out: 2123.08,2708 3873.08,2704 3878.08,2704 3878.08,2699 2123.14,2701.14
  text "L3 (ML1) .G1" at 434.63,-1086.63 h100
Mid-Layer 2:
  pour cut-out: 2162.95,905.4 3917.95,901.39 2162.97,903.53
  pour cut-out: 2141.97,1500.43 3891.97,1496.43 3896.97,1496.43 3896.97,1491.43 2142.03,1493.57
  pour cut-out: 2126.49,2129.39 3876.49,2125.39 3881.49,2125.39 3881.49,2120.39 2126.56,2122.53
  pour cut-out: 2123,2708 3873,2704 3878,2704 3878,2699 2123.07,2701.14
  text "L5 (ML2) .G2" at 409.63,-1286.63 h100
Bottom Layer:
  text "L6 (BOT) .GBL" at 1319.63,-1714.13 h100
Internal Plane 1 (plane layer: these items are gaps in the copper):
  lines w0.03: 989.63,3629 1737.03,3629
  lines w5: 3741.2,2722 3800,2722 3800,2997 3849,3046 3849,3150 ; 3742,2722 3742,2806 3655.87,2892.13 3636,2912 3636,2958 3651.5,2973.5 3709.5,2973.5 3757,3021 3757,3148 3759,3150 3782,3173 3782,3274 3849,3274 3849,3148 ; 3757,2552 3757,2425 3709.5,2377.5 3651.5,2377.5 3636,2362 3636,2316 3655.87,2296.13 3742,2210 3742,2125 3800,2125 3800,2401 3849,2450 3849,2554 ; 3758,755 3758,628 3710.5,580.5 3652.5,580.5 3637,565 3637,519 3656.87,499.13 3743,413 3743,339 3801,339 3801,604 3850,653 3850,757 ; 3758,1353 3758,1226 3710.5,1178.5 3652.5,1178.5 3637,1163 3637,1117 3656.87,1097.13 3743,1011 3743,929 3801,929 3801,1202 3850,1251 3850,1355 ; 3759,2554 3782,2577 3782,2678 3846.6,2678 ; 3760,757 3783,780 3783,881 3847.6,881 ; 3760,1355 3783,1378 3783,1478 3847.6,1478 ; 3849,2552 3849,2678 ; 3850,755 3850,881 ; 3850,1353 3850,1478
  lines w10: -486.8,4.07 -261.8,4.07 ; -486.8,3625.73 -261.8,3625.73 ; 993.63,3629 -785,3629 -785,-1 1029.63,-1 1679.63,-1 ; 2110,2126 3952,2126 ; 2115.32,904.2 3957.32,904.2 ; 2125,2704 3967,2704 ; 2142,1497 3984,1497 ; 5191.37,-1 5416.37,-1 ; 5191.37,1754 5416.37,1754 ; 5285.12,55.25 5303.87,-1 ; 5285.12,1697.75 5303.87,1754 ; 5287,169 5512,169 ; 5287,1754 5512,1754 ; 5303.87,696.92 5303.87,-1 ; 5303.87,1056.08 5303.87,1754 ; 5322.62,55.25 5303.87,-1 ; 5322.62,1697.75 5303.87,1754 ; 5380.75,225.25 5399.5,169 ; 5380.75,1697.75 5399.5,1754 ; 5399.5,781.92 5399.5,169 ; 5399.5,1141.08 5399.5,1754 ; 5418.25,225.25 5399.5,169 ; 5418.25,1697.75 5399.5,1754
  lines w40: 1107,-1.02 1107,1496 1202,1591 1619,1591 1735,1707 1735,1884 1848,1997 1848,2123 1801,2170 1395,2170 1109,2456 1109,3620
  text "1585m" at 5349.5,1084.83 h56.25 r270
  text "1755m" at 5253.87,999.83 h56.25 r270
  text "L2 (GND) .GP1" at 402.13,-876.63 h100
Internal Plane 2 (plane layer: these items are gaps in the copper):
  pour cut-out: 3104.21,902.5 3971.5,902.5 3971.5,891.5 3104.21,891.5
  pour cut-out: 2122.43,907 2531.43,907 2531.43,897 2122.43,896
  pour cut-out: 2145,1502 3964,1501 3964,1488.5 2908.29,1487 2145,1487.21
  pour cut-out: 2118,2088.5 3953,2088.5 3953,2079 2897.29,2077.5 2118,2078
  pour cut-out: 3096.71,2707 3964,2707 3964,2696 3096.71,2696
  pour cut-out: 2121,2710 2530,2710 2530,2700 2121,2699
  lines w40: 751.73,-5.07 -790,-4.72 -790,3630.64 1065.86,3630.64 ; 1070.63,3629 1735.63,3629 ; 1075.73,3623.9 1730.54,3623.9 ; 1105,9 1109,13 1109,1506 1195,1592 1620,1592 1737,1709 1737,1885 1849,1997 1849,2120 1801,2168 1397,2168 1109,2456 ; 1106,2468 1106,3627 ; 1109,3615 1112,3618 ; 1615,3305.57 1615,3307.24 1537.24,3307.24 1500.43,3270.43 1500.43,3191 1388,3078.57 1388,2563 1597,2354 1672.59,2354 1716,2310.59 1743.59,2283 1835.48,2283 ; 1616.67,3307.24 1698.76,3307.24 2267,3307.24 2384.24,3190 2387,3190 2480,3190 2550,3120 2550,3027 2550,2192 2616.96,2125.04 3011.04,2125.04 3080,2194 3080,3270 2890,3460 2890,3626.75 ; 1736.63,3629 4407.5,3629 4407.5,1755 4922.63,1755 4922.63,170 4402.5,170 4402.5,-1 2654.63,-1 ; 1840,2283 1896.48,2283 2020,2159.48 2020,1637.89 1742.11,1360 1560,1360 1510,1310 1510,810 2030,290 2440,290 2550,400 2550,1440 2581,1471 3046,1471 3090,1427 3090,330 2760,0
  text "L4 (PWR) .GP2" at 402.13,-1496.63 h100

## Silkscreen, mask and mechanical layers (free items; w line width, h text height)
Top Overlay:
  lines w5: 1397.63,219 1397.63,3394 4317.63,3394 4317.63,219 1397.63,219 ; 1482.63,304 1482.63,3304 4232.63,3304 4232.63,304 1482.63,304
  text "McGill Digital fMUX DAN Test Mezz" at 2703.94,3538 h45
  text "Rev 0 - Made in CANADA - Sept 2012" at 2759.75,3480.04 h33.75
  text "12V LED" at -404,3474 h25
  text "adamjohngilbert@gmail.com" at 3579.75,3424.23 h30
  text "Matt Dobbs <Matt.Dobbs@McGill.ca>" at 2624.51,3422.08 h30
  text "12V  x  Gnd" at -517,3262 h25
  text "+5VA Reg" at 2161,3246 h40
  text "2V5 Ref" at 2429,3220 h40
  text "Opamp" at 4080,3190 h40
  text "FluxBias DifAmp" at 2236,2941 h40 r270
  text "NullerA" at 4023,2786 h40
  text "Transformers" at 3376,2694 h40
  text "2V5 Ref" at 2433,2624 h40
  text "Opamp" at 4084,2609 h40
  text "-5VA Reg" at 1563,2164 h40
  text "CarrierA" at 4009,2154 h40
  text "ADC Anti-aliasing Filters" at 2640,2014 h40
  text "DemodA" at 3880,1890 h40
  text "Differential Amps" at 3271,1685 h40 r90
  text "DemodB" at 3883,1566 h40
  text "2V5 Ref" at 2451,1453.83 h40
  text "Opamp" at 4080,1402 h40
  text "CarrierB" at 4031,944 h40
  text "FluxBias DifAmp" at 2155,935 h40 r270
  text "Transformers" at 3370,899 h40
  text "2V5 Ref" at 2438,824.18 h40
  text "Opamp" at 4080,799 h40
  text "+2.5VA Reg" at 1525,702 h40
  text "Mount DB15f this side" at 4779.65,585.67 h30 r90
  text "NullerB" at 4045,363 h40
  text "MBGnd" at 455,103 h40
  text "DGnd" at 1295,103 h40
  text "AGnd" at 3375,102 h40
  text "TOP IDENT (.GTO)" at 2394.63,-714.13 h100
Bottom Overlay:
  text "2.5V LED" at 29,3475 h25
  text "Translator" at 904,3456 h40
  text "Gnd  x  12V" at -253,3285 h25 r180
  text "5VD Reg" at 1188,2807 h40
  text "IRefDac" at 2634,2691 h40
  text "A Channel Fast DACs" at 3157,2680 h40
  text "Slow DAC" at 1725.25,2611 h40
  text "+5V5 Buck" at 678,2501 h40
  text "IRefDac" at 2634,2085 h40
  text "-5V5 Buck" at 686,1861 h40
  text "ADC ChanA&B" at 2320,1643 h40
  text "1" at 4472.97,1423.43 h30 r270
  text "Translator" at 913,1365.34 h40
  text "Slow DAC" at 1904,983 h40
  text "IRefDac" at 2634,891 h40
  text "B Channel Fast DACs" at 3159,880 h40
  text "Temp" at 1231,674 h40
  text "Translator" at 898,522 h40
  text "IRefDac" at 2634,292 h40
  text "BOTTOM IDENT (.GBO)" at 3902.13,-896.63 h100
Top Paste:
  text "TOP SOLDER PASTE (.GTP)" at 2402.13,-1316.63 h100
Bottom Paste:
  text "BOTTOM SOLDER PASTE (.GBP)" at 4542.13,-1716.63 h100
Top Solder:
  text "TOP SOLDER MASK (.GTS)" at 2382.13,-1096.63 h100
Bottom Solder:
  text "BOTTOM SOLDER MASK (.GBS)" at 4522.13,-1516.63 h100
Mechanical 1:
  lines w2: 4869.63,0 4920.83,0 4920.83,56.5 ; -785,5 -780,0 0,0 4405,0 4405,169 4920.83,169 4920.83,1754 4409.07,1754 4409.07,3625.73 0,3625.73 -778.73,3625.73 -785,3625.73 -785,3560 -785,5
  text "McGill: DfMux DAN Mezz Test Board  Rev0" at 467.5,4722.5 h100
  text "Nominal Size: 4.920 x 3.625 inches" at 543,4454 h100
  text "FINISHED BOARD: 0.062\" (Nom)  370HR" at 488,4196.5 h100
  text "ARRANGE LAYERS SEQUENTIALLY: L1-L6" at 528,3986.5 h100
  text "Thieving Copper Dots CAN be added to INNER layers if needed" at 8,3806.5 h80
  text "BOARD OUTLINE" at 412.5,-1912.5 h100
Drill Drawing:
  lines w5: 5620.93,3481.35 7471.32,3481.35
  lines w20: 5274.67,3139.5 5786.48,3139.5 ; 5287.17,3377 5798.98,3377 ; 5294.67,2852.5 5806.48,2852.5 ; 5297.17,2519.5 5808.98,2519.5 ; 5304.67,2064.5 5816.48,2064.5 ; 5305.57,2284.71 5817.38,2284.71
  text ".Legend" at 5000,3770 h100
  text "370HR : 6 Layer PCB, Approximate Build:" at 4705,3562.5 h80
  text "TopLayer :0.5oz Plus Plating" at 5865.22,3363.24 h60
  text "L1" at 5105,3340 h80
  text "4.0 mils spacing" at 5708.11,3236.66 h60
  text "Plane 1: 1oz" at 5853.05,3114.2 h60
  text "L2" at 5107.5,3105 h80
  text "5.0 mils spacing" at 5708.11,2986.66 h60
  text "MidLayer1: 1/2oz" at 5844.76,2820.03 h60
  text "L3" at 5090,2817.5 h80
  text "Excess Material (Aprox 38mils)" at 5392.5,2635 h60
  text "MidLayer4: 1/2oz" at 5847.26,2487.03 h60
  text "L4" at 5102.5,2482.5 h80
  text "5.0 mils spacing" at 5730,2372.5 h60
  text "L5" at 5122.5,2252.5 h80
  text "Plane 2 : 1oz" at 5896.12,2245.34 h60
  text "4.0 mils spacing" at 5705,2152.5 h60
  text "Bottom Layer :0.5oz Plus Plating" at 5889.49,2045.38 h60
  text "L6" at 5122.5,2030 h80
  text "Total thickness = .063" at 5365.22,1905.57 h60
  text "ALL ROUTED LAYERS:" at 5515,1732.5 h60
  text "7 mils = 50 OHMS" at 5587.5,1612.5 h60
  text "FINISHED HOLE SIZES" at 5385,1382.5 h100
  text "DRILL DRAWING (.GD1)" at 2880,-1922.5 h100

## Dimensions
-887,-8.33 to -836,3614.67 on Internal Plane 1
-785,-96 to 4407,-103 on Internal Plane 1
-785,-414 to 4920.83,169 on Internal Plane 1

## Text inside footprints (layer, text, board x,y; h text height)
J2: Top Overlay "1" at 4482.75,1419.53 h37.5 r270; Top Overlay "SKT" at 4677.63,1702.7 h37.5 r270; Bottom Overlay "15" at 4654.13,598.32 h37.5 r270; Bottom Overlay "8" at 4469.12,504.42 h37.5 r270; Bottom Overlay "9" at 4714.13,1299.42 h37.5 r90